# Altium PCB SS_MB_CONV2.0.PcbDoc (part 4 of 4)
Units mil, origin at the board's own origin, x right, y up, seen from the top; angles counter-clockwise.
Board outline 5818.45 x 4760.12 mil, 4 copper layers (Top Layer, Internal Plane 1, Internal Plane 2, Bottom Layer), stack 30.634 mil thick; 381 components, 398 nets, 1514 pads, 801 vias.
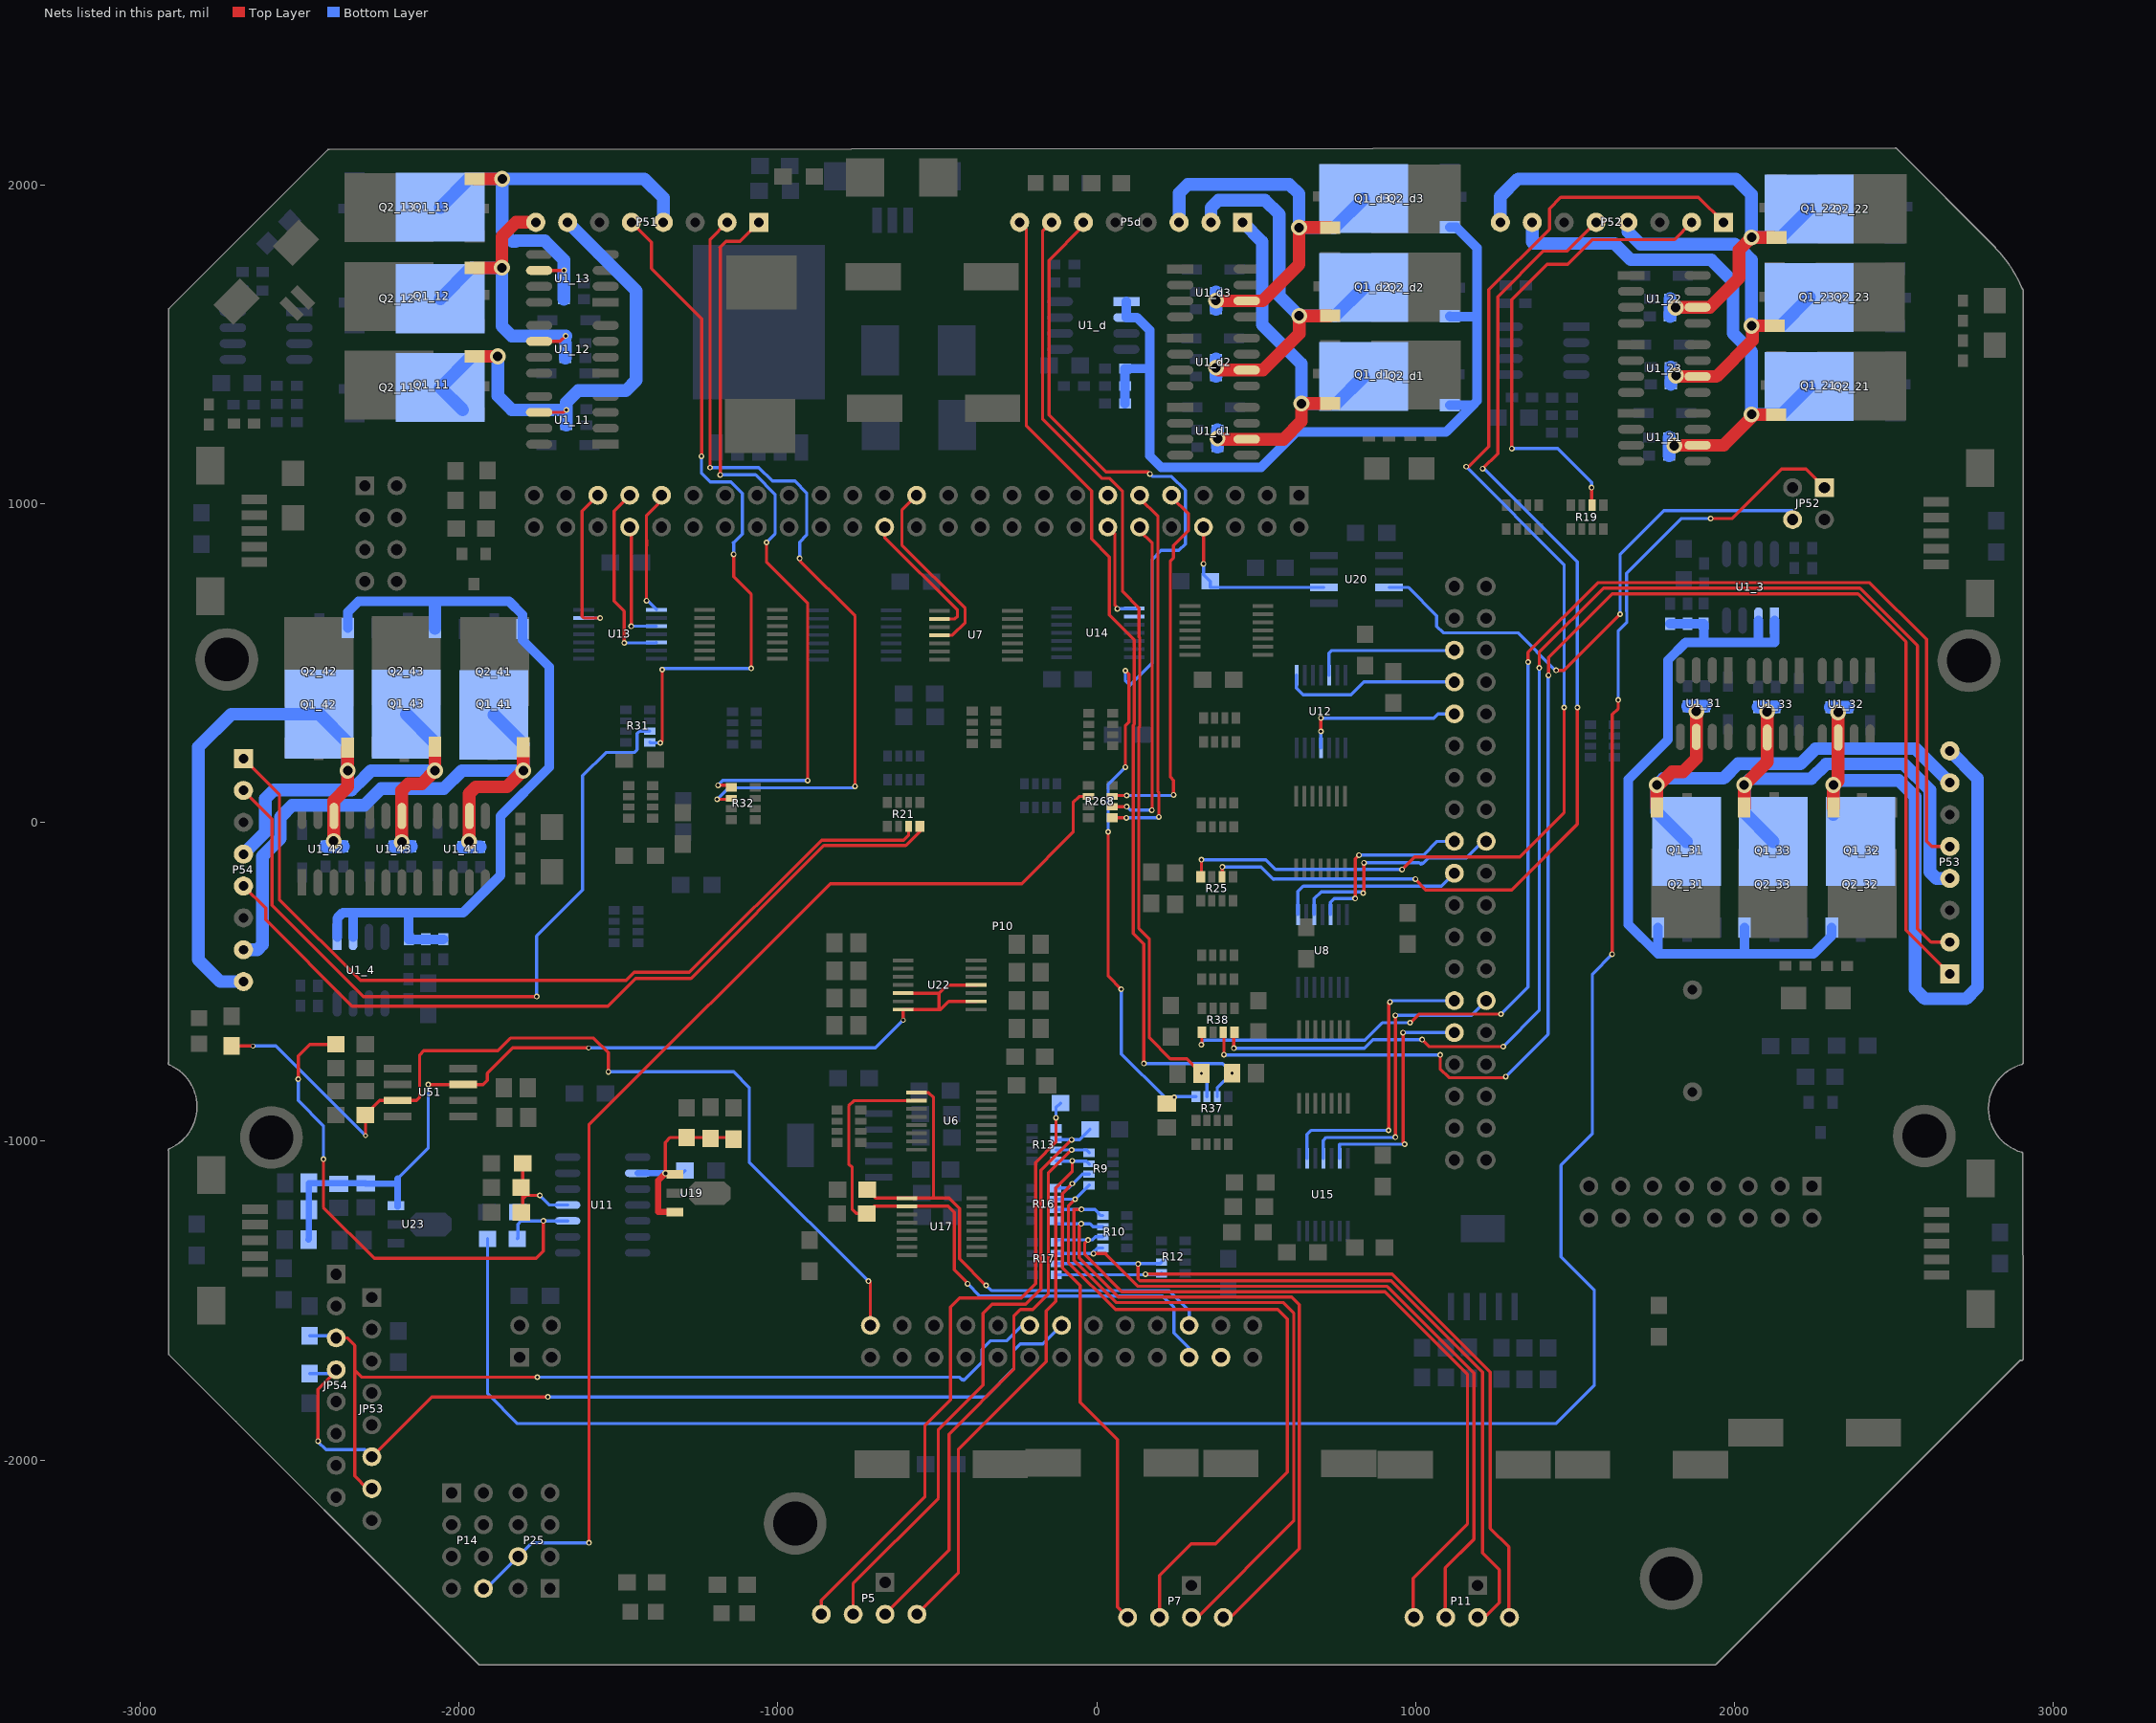
[diagram p6: the nets of this part, all layers, seen from the top]

## Via types
v1: diameter 18, hole 10, Top Layer to Bottom Layer, 606 vias
v2: diameter 25, hole 12, Top Layer to Bottom Layer, 77 vias
v3: diameter 15, hole 10, Top Layer to Bottom Layer, 44 vias
v4: diameter 20, hole 12, Top Layer to Bottom Layer, 43 vias
v5: diameter 50, hole 30, Top Layer to Bottom Layer, 28 vias
v6: diameter 30, hole 20, Top Layer to Bottom Layer, 1 vias
v7: diameter 40, hole 25, Top Layer to Bottom Layer, 1 vias
v8: diameter 30, hole 16, Top Layer to Bottom Layer, 1 vias

## Nets (pads, with @x,y where several pads share a name; then routed paths per layer and width w, separated by ;. In a path a pad name is that pad's centre, name@x,y a point inside that pad or via, vN(x,y) a via of type N, cw(c..) or ccw(c..) an arc to the next point about the centre after c; other vN are vias at no path point) (continued)
PGND_3: C3_31.1 C3_32.1 C3_33.1 Q2_31.3 Q2_32.3 Q2_33.3 U1_3.1 U1_3.2 | length 2437.2
  Bottom Layer w30: Q2_31.3@1760.08,-329.06 1760.08,-411.21 ; C3_32.1@1798.37,623.94 1798.87,624.44 C3_33.1@1904,624.44 1904,569.94 1899,564.94 ; Q2_33.3@2032.16,-329.06 2032.16,-411.21 1760.08,-411.21 ; 2033,-412.06 2249,-412.06 2306,-355.06 Q2_32.3@2306,-329.06 ; U1_3.2@2076,634.28 2076,567.94 2073,564.94 ; U1_3.1@2126,634.28 2126,565.94 2127,564.94 2073,564.94 ; 1760.08,-411.21 1760.08,-412.06 1667.54,-319.51 1667.54,135.48 1792,259.94 1792,509.94 1847,564.94 1899,564.94 ; 1899,564.94 2073,564.94
PGND_4: C3_41.1 C3_42.1 C3_43.1 Q2_41.3 Q2_42.3 Q2_43.3 U1_4.1 U1_4.2 | length 2525.8
  Bottom Layer w30: U1_4.1@-2383.04,-359 -2383.04,-300.04 -2365,-282 -2330,-282 ; Q2_42.3@-2349.04,609.84 -2349.04,660.96 -2316,694 -1843,694 -1801.04,652.04 Q2_41.3@-1801.04,607.69 -1801.04,573.04 -1717,489 -1717,174 -1870,21 -1870,-165 -1987,-282 -2165,-282 ; U1_4.2@-2333.04,-359 -2333.04,-285.04 -2330,-282 ; C3_43.1@-2049.5,-366 -2050,-366.5 C3_42.1@-2158,-366.5 -2158,-289 -2165,-282 ; -2330,-282 -2165,-282
  Bottom Layer w40: Q2_43.3@-2076.04,609.84 -2076.04,687.96
PGND_d: C3_d1.1 C3_d2.1 C3_d3.1 Q2_d1.3 Q2_d2.3 Q2_d3.3 U1_d.1 U1_d.2 | length 2603.4
  Bottom Layer w30: C3_d3.1@89,1314.7 C3_d1.1@89,1369.7 C3_d2.1@89,1424.7 161.26,1424.7 166,1419.96 ; U1_d.1@93,1635 U1_d.2@93,1585 126,1585 166,1545 166,1419.96 ; Q2_d1.3@1107,1310 1180,1310 ; Q2_d2.3@1107,1589 1109.04,1586.96 1193,1586.96 ; Q2_d3.3@1107,1868 1128,1868 1193,1803 1193,1586.96 ; 166,1419.96 166,1151 202,1115 515.5,1115 626.5,1226 1096,1226 1180,1310 ; 1180,1310 1193,1323 1193,1586.96
RES_F: P10.11 R268.1 | length 1181.5
  Top Layer w10: R268.1@48.8,15 v1(93,15) ; P10.11@134.81,1027.15 134.81,1018.19 192,961 192,97 195,94 v1(195,18)
  Bottom Layer w10: v1(93,15) 192,15 v1(195,18)
RXD0: U14.9
RXD0_F: P10.14 U14.8 | length 325.5
  Top Layer w10: P10.14@34.81,927.15 57,904.96 57,682 65,674 v1(65,671)
  Bottom Layer w10: v1(65,671) 120.73,671 U14.8@121.5,671.77
S1: P5.2 R13.8 R44.1 | length 2061.8
  Top Layer w10: P5.2@-864,-2484 -864,-2440 -539,-2115 -539,-1891 -459,-1811 -459,-1520 -431,-1492 -237,-1492 -192,-1447 -192,-1067 -128,-1003 v1(-128,-926)
  Bottom Layer w10: R13.8@-128,-960 v1(-128,-926) -128,-894.5 R44.1@-114,-880.5
S2: P5.3 R13.6 R43.1 | length 1954.9
  Top Layer w10: P5.3@-764,-2484 -764,-2387 -497,-2120 -497,-1905 -357,-1765 -357,-1540 -328,-1511 -223,-1511 -175,-1463 -175,-1091 v1(-79,-995)
  Bottom Layer w10: R13.6@-128,-995 v1(-79,-995) -54,-995 R43.1@-21,-962
S3: P5.4 R9.7 R13.4 | length 1829.5
  Top Layer w10: P5.4@-664,-2484 -463,-2283 -463,-1919 -260,-1716 -260,-1549 -239,-1528 -201,-1528 -152,-1479 -152,-1100 v1(-79,-1027)
  Bottom Layer w10: R13.4@-128,-1027 v1(-79,-1027) -32.8,-1027 R9.7@-23.8,-1036
S4: P5.5 R9.5 R13.2 | length 1732.6
  Top Layer w10: P5.5@-564,-2484 -434,-2354 -434,-1966.29 -159,-1691.29 -159,-1532 -128.78,-1501.78 -128.78,-1146.78 -77,-1095 v1(-77,-1061)
  Bottom Layer w10: R13.2@-128,-1062 -32.8,-1062 R9.5@-23.8,-1071
S5: P7.2 R9.3 R16.1 | length 1582.2
  Top Layer w10: v1(-77,-1133) -108,-1164 -108,-1397 -52,-1453 -52,-1819 65,-1936 65,-2462 P7.2@97,-2494
  Bottom Layer w10: R16.1@-129,-1147 -88.3,-1147 -44.3,-1103 R9.3@-23.8,-1103
S6: P7.3 R9.1 R16.3 | length 2238.2
  Top Layer w10: v1(-67.8,-1182) -89,-1203.2 -89,-1380.08 58.77,-1527.85 567.85,-1527.85 598,-1558 598,-2038 373,-2263 296,-2263 197,-2362 P7.3@197,-2494
  Bottom Layer w10: R16.3@-129,-1182 v1(-67.8,-1182) R9.1@-23.8,-1138
S7: P7.4 R10.7 R16.5 | length 2196.4
  Top Layer w10: v1(-48,-1214) -72,-1214 -72,-1373.04 60.96,-1506 585,-1506 618,-1539 618,-2191 315,-2494 P7.4@297,-2494
  Bottom Layer w10: R16.5@-129,-1214 v1(-48,-1214) -5.8,-1214 13.2,-1233 R10.7@19.2,-1233
S8: P7.5 R10.5 R16.7 | length 2115.7
  Top Layer w10: v1(-49,-1259) -55,-1265 -55,-1366 68,-1489 611.55,-1489 635,-1512.45 635,-2279 420,-2494 P7.5@397,-2494
  Bottom Layer w10: R16.7@-129,-1249 -129,-1258.78 -128.78,-1259 v1(-49,-1259) -21.22,-1259 -21,-1258.78 -11.78,-1268 R10.5@19.2,-1268
S9: P11.2 R10.3 R17.1 | length 2397.5
  Top Layer w10: v1(-27,-1310) -38,-1321 -38,-1354.28 -27,-1365.28 -27,-1366.04 78.96,-1472 903.96,-1472 1163,-1731.04 1163,-2201 993,-2371 P11.2@993,-2494
  Bottom Layer w10: R17.1@-127,-1317 -127,-1309.22 -13,-1309.22 -3.78,-1300 R10.3@19.2,-1300
S10: P11.3 R10.1 R17.3 | length 2311.7
  Top Layer w10: v1(-10,-1352.59) 28.59,-1352.59 29,-1353 29,-1355.04 128.96,-1455 911,-1455 1183,-1727 1183,-2249 1093,-2339 P11.3@1093,-2494
  Bottom Layer w10: R17.3@-127,-1352 -126,-1353 -125.59,-1352.59 v1(-10,-1352.59) -10,-1349 -11,-1348 2,-1335 R10.1@19.2,-1335
S11: P11.4 R12.3 R17.5 | length 2415
  Top Layer w10: v1(130,-1385) 130,-1432 136,-1438 923.96,-1438 1210,-1724.04 1210,-2292 1263,-2345 1263,-2448 1217,-2494 P11.4@1195,-2494 P11.4@1193,-2494
  Bottom Layer w10: R17.5@-127,-1384 198,-1384 R12.3@203,-1379
S12: P11.5 R12.1 R17.7 | length 2334.7
  Top Layer w10: v1(153,-1417) 927,-1417 1234.53,-1724.53 1234.53,-2214.53 1293,-2273 P11.5@1293,-2494
  Bottom Layer w10: R17.7@-127,-1419 198,-1419 R12.1@203,-1414
SA_1: P51.1 R32.1 | length 2360.6
  Top Layer w10: v1(-1188,117) -1152,117 R32.1@-1146,111 ; v1(-1181,1091) -1181,1804 -1182,1805 -1162.69,1824.31 -1119,1824.31 P51.1@-1059.73,1883.58 ; v1(-1036,879) -1036,818.08 -907,689.08 v1(-907,132)
  Bottom Layer w10: v1(-1188,117) -1173,132 v1(-907,132) ; v1(-1181,1091) -1070.31,1091 -1009,1029.69 -1009,906 v1(-1036,879)
SA_1_F: P10.43 U13.12 | length 598.2
  Top Layer w10: v1(-1482,564) -1482,663.04 -1514,695.04 -1514,978 -1465.19,1026.81 P10.43@-1465.19,1027.15
  Bottom Layer w10: v1(-1482,564) -1382.41,564 U13.12@-1381,565.41
SA_2: P52.1 R25.2 | length 4008
  Top Layer w10: R25.2@326,-170.2 328.59,-167.61 v1(328.59,-116.41) ; v1(958,-147) 997,-108 1327,-108 1466,31 v1(1466,361) ; v1(1159,1117) 1167,1117 1230,1180 1230,1672 1420,1862 1420,1926.34 1455.66,1962 1887.85,1962 P52.1@1966.27,1883.58
  Bottom Layer w10: v1(328.59,-116.41) 329.18,-117 452.78,-117 453.37,-116.41 530.41,-116.41 561,-147 v1(958,-147) ; v1(1159,1117) 1466,810 v1(1466,361)
SA_2_F: P10.144 U12.8 | length 561.3
  Bottom Layer w10: U12.8@626.64,462.5 626.64,421.41 647.02,401.02 798.1,401.02 838.22,441.15 P10.144@1121.81,441.15
SA_3: P53.1 R38.5 | length 4749.1
  Top Layer w10: R38.5@397,-657.8 399,-659.8 v1(399,-728) ; v1(1077.28,-729) 1077.28,-773.05 1104.61,-800.38 1279.78,-800.38 v1(1283.16,-797) ; v1(1417,462.5) 1417,518 1617,718 2388,718 2539,567 2539,-337.63 P53.1@2676.38,-475.01
  Bottom Layer w10: v1(399,-728) 400,-729 v1(1077.28,-729) ; v1(1283.16,-797) 1416,-664.16 1416,461.5 v1(1417,462.5)
SA_3_F: P10.133 U8.10 | length 727.2
  Top Layer w10: v1(836,-221) 838.35,-218.65 v1(838.35,-126)
  Bottom Layer w10: U8.10@682.23,-288.5 682.23,-238.77 704,-217 832,-217 v1(836,-221) ; v1(838.35,-126) 1011.04,-126 1013.04,-128 1014.04,-127 1017.04,-130 1020.04,-127 1022.04,-129 1040.04,-111 1159.4,-111 1211.55,-58.85 P10.133@1221.81,-58.85
SA_4: P54.1 R21.5 | length 2784
  Top Layer w10: P54.1@-2676.84,200.99 -2564,88.15 -2564,-241.04 -2310.04,-495 -1476.04,-495 -1451.04,-470 -1278.04,-470 -863.04,-55 -606,-55 -590,-39 R21.5@-590,-11.8
SA_4_F: P10.28 U7.2 | length 433.9
  Top Layer w10: P10.28@-665.19,927.15 -665.19,894.96 -437,666.77 -437,647 -444.82,639.18 U7.2@-493,639.18
SA_DB: P5d.6 R37.1 R91.2 | length 3489.4
  Top Layer w10: P5d.6@-41.73,1883.58 -41.73,1872.82 -150,1764.55 -150,1279 29,1100 161,1100 v1(167,1094) ; v1(36,-28.89) 36,-482 v1(77,-523) ; v1@88,172 v1(90,174) 90,304.72 101,315.72 101,466 v1(90,477)
  Bottom Layer w10: v1(36,-28.89) 36,120 v1(90,174) ; v1(77,-523) 77,-726 213,-862 v1(243,-862) 245,-860 R37.1@311,-860 ; v1(90,477) 90,445 104,431 174,501 174,826 202,854 257.77,854 277.8,874.03 277.8,1042.89 234.69,1086 174,1086 174,1087 v1(167,1094)
SA_DB_F: P10.123 U15.4 | length 972.2
  Top Layer w10: v1(937,-987) v1(937,-605)
  Bottom Layer w10: U15.4@710.82,-1053.5 710.82,-997.18 720,-988 v1(937,-987) ; v1(937,-605) 1175.66,-605 P10.123@1221.81,-558.85
SB_1: P51.2 R32.3 | length 2625.9
  Top Layer w10: v1(-1213,1114) -1213,1830.31 P51.2@-1159.73,1883.58 ; v1(-1191,73) -1149,73 R32.3@-1146,76 ; v1(-932,829) -932,822.04 -758,648.04 v1(-758,114)
  Bottom Layer w10: v1(-1213,1114) -1060,1114 -1017.57,1071.57 -946.43,1071.57 -910,1035.15 -910,902 -932,880 v1(-932,829) ; v1(-1191,73) -1155,109 -763,109 v1(-758,114)
SB_1_F: P10.41 U13.8 | length 394.5
  Top Layer w10: v1(-1412,696.41) -1412.85,697.26 -1412.85,867.45 -1411.85,868.45 -1411.85,885.85 -1412.85,886.85 -1412.85,962.15 -1365.19,1009.81 P10.41@-1365.19,1027.15
  Bottom Layer w10: v1(-1412,696.41) -1409.64,696.41 U13.8@-1381,667.77
SB_2: P52.2 R19.6 | length 1498.7
  Top Layer w10: v1(1302,1174) 1302,1641 1413,1752 1477.08,1752 1554.08,1829 1811.69,1829 P52.2@1866.27,1883.58 ; v1(1552.08,1051) 1552.08,997.72 R19.6@1554,995.8
  Bottom Layer w10: v1(1302,1174) 1446,1174 1552.08,1067.92 v1(1552.08,1051)
SB_2_F: P10.146 U12.12 | length 466.1
  Bottom Layer w10: U12.12@729,462.5 729,532 737,540 1120.66,540 P10.146@1121.81,541.15
SB_3: P53.2 R38.7 | length 4552.4
  Top Layer w10: v1(430,-708) 430,-659.8 R38.7@432,-657.8 ; v1(1021,-681) 1043,-703 v1(1275,-703) ; v1(1388,485.2) 1388,534 1590,736 2394.04,736 2575,555.04 2575,-332.68 2617.32,-375.01 P53.2@2676.38,-375.01
  Bottom Layer w10: v1(430,-708) 839.89,-708 866.89,-681 v1(1021,-681) ; v1(1275,-703) 1388,-590 v1(1388,485.2)
SB_3_F: P10.134 U8.12 | length 578.7
  Top Layer w10: v1(811,-238) 811,-114 v1(823,-102)
  Bottom Layer w10: U8.12@733.41,-288.5 733.41,-250 745.41,-238 v1(811,-238) ; v1(823,-102) 1025,-102 1068.15,-58.85 P10.134@1121.81,-58.85
SB_4: P54.2 R31.5 | length 2398.2
  Top Layer w10: P54.2@-2676.84,100.99 -2587,11.15 -2587,-260 -2301,-546 v1(-1757,-546)
  Bottom Layer w10: v1(-1757,-546) -1757,-356 -1613,-212 -1613,147 -1540,220 -1451,220 -1442,229 -1442,280 -1435,287 R31.5@-1402,287
SB_4_F: P10.45 U13.6 | length 510.4
  Top Layer w10: P10.45@-1565.19,1027.15 -1614.24,978.09 -1614.24,646.92 -1609.32,642 v1(-1558,642)
  Bottom Layer w10: U13.6@-1609.5,642.18 -1558.18,642.18 v1(-1558,642)
SB_DB: P5d.7 R37.3 R90.2 | length 3015.5
  Top Layer w10: P5d.7@-141.73,1883.58 -170,1855.31 -170,1267 17,1080 40.69,1080 81,1039.69 81,725 133,673 133,582.04 135,580.04 135,301.63 132,298.63 132,-332.45 165,-365.45 165,-675.12 230.88,-741 282.31,-741 v1(328.4,-787.09)
  Bottom Layer w10: v1(328.4,-787.09) 346,-804.69 R37.3@346,-860
SB_DB_F: P10.124 U15.2 | length 948
  Top Layer w10: v1(915.15,-965.85) 916.15,-964.85 916.15,-765.15 916,-765 916,-567 v1(920,-563)
  Bottom Layer w10: U15.2@659.64,-1053.5 659.64,-978.36 672.15,-965.85 v1(915.15,-965.85) ; v1(920,-563) 920,-559.7 919.15,-558.85 P10.124@1121.81,-558.85
SC_1: P51.5 R31.7 | length 2169.4
  Top Layer w10: P51.5@-1459.73,1883.58 -1397.15,1821 -1397.15,1739.15 -1239,1581 v1@-1239,1150 ; v1(-1369,250) -1363,256 v1(-1363,480) ; v1(-1139,842) -1139,772 -1084,717 v1(-1084,484)
  Bottom Layer w10: R31.7@-1402,252 -1400,250 v1(-1369,250) ; v1(-1363,480) -1363,482 -1365,484 v1(-1084,484) ; v1(-1240,1150) -1240,1096.15 -1212.53,1068.68 -1147.99,1068.68 -1112,1032.69 -1112,905 -1139,878 -1139,877 ; -1140,878 -1139,877 ; v1(-1139,842) -1139,877
SC_1_F: P10.44 U13.10 | length 401.4
  Top Layer w10: P10.44@-1465.19,927.15 -1460,921.96 v1(-1460,616)
  Bottom Layer w10: v1(-1460,616) -1463.82,616 -1464.41,616.59 U13.10@-1381,616.59
SC_2: P52.5 R25.6 | length 3472
  Top Layer w10: R25.6@393,-170.2 389.81,-167.01 394,-162.82 v1(394,-139) ; v1(1000,-177) 1000,-179 1032,-211 1302,-211 1508,-5 v1(1508,361) ; v1(1210.57,1110.57) 1258,1158 1258,1650 1401.31,1793.31 1476,1793.31 P52.5@1566.27,1883.58
  Bottom Layer w10: v1(394,-139) 515,-139 555,-179 557,-177 v1(1000,-177) ; v1(1210.57,1110.57) 1215.57,1110.57 1508,818.15 v1(1508,361)
SC_2_F: P10.142 U12.4 | length 515.5
  Top Layer w10: v1(703,286) v1(703,328)
  Bottom Layer w10: v1(703,328) 704,327 1057.04,327 1071.19,341.15 P10.142@1121.81,341.15 ; U12.4@703.41,234 v1@703.41,282.41
SC_3: P53.5 R38.1 | length 4320.7
  Top Layer w10: v1(328,-697) 330,-695 R38.1@330,-657.8 ; v1(983,-628) 1010,-601 v1(1268,-601) ; v1(1353,504) 1353,533.92 1572.08,753 2425,753 2603,575 2603,-58 2620.01,-75.01 P53.5@2676.38,-75.01
  Bottom Layer w10: v1(328,-697) 328,-692 337,-683 840.85,-683 895.85,-628 v1(983,-628) ; v1(1268,-601) 1353,-516 v1(1353,504)
SC_3_F: P10.132 U8.8 | length 587
  Bottom Layer w10: U8.8@631.05,-288.5 631.05,-215.95 648,-199 1081.66,-199 P10.132@1121.81,-158.85
SC_4: P54.5 R21.7 | length 2542.4
  Top Layer w10: P54.5@-2676.84,-199.01 -2607,-268.85 -2607,-305 -2336,-576 -1533,-576 -1446,-489 -1273,-489 -856,-72 -598.96,-72 -555,-28.04 R21.7@-555,-11.8
SC_4_F: P10.25 U7.4 | length 596.7
  Top Layer w10: P10.25@-565.19,1027.15 -611,981.34 -611,870 -413,672 -413,628 -453,588 U7.4@-493,588
SC_DB: P5d.8 R37.5 R89.2 | length 3185.8
  Top Layer w10: P5d.8@-241.73,1883.58 -221,1862.85 -221,1246 -16,1041 -16,890 40,834 40,651 118,573 118,308.67 115,305.67 115,-348 148,-381 v1(148,-756)
  Bottom Layer w10: v1(148,-756) 394.6,-756 v1(424.6,-786) 378,-832.6 R37.5@378,-860
SC_DB_F: P10.122 U15.6 | length 761.4
  Top Layer w10: v1(961,-659) 961,-1004 v1(966,-1009)
  Bottom Layer w10: U15.6@762,-1053.5 762,-1009 v1(966,-1009) ; v1(961,-659) 1121.66,-659 P10.122@1121.81,-658.85
SCK11: P14.8 P25.4 R268.6 | length 3750.2
  Top Layer w10: v1(-1593,-2260.22) -1593,-948.4 -836.1,-191.5 -235.42,-191.5 -74,-30.08 -74,63 -55,82 R268.6@-26,82
  Bottom Layer w10: P14.8@-1923.83,-2403.22 -1915,-2403.22 P25.4@-1815,-2303.22 -1772,-2260.22 v1(-1593,-2260.22)
SCL: P10.94 R35.2 U6.1 U17.1 | length 1680.5
  Top Layer w10: R35.2@-720,-1152 -693.77,-1178.23 U17.1@-595,-1178.23 -512,-1178.23 ; U6.1@-565,-847.23 -527.77,-847.23 -512,-863 -512,-1178.23 ; v1(-347,-1452) -430,-1369 -430,-1211 -462.77,-1178.23 -512,-1178.23
  Bottom Layer w10: v1(-347,-1452) -330.68,-1468.32 226.32,-1468.32 289.81,-1531.81 P10.94@289.81,-1577.85
SCL_24: JP53.7 JP54.3 P10.84 R107.2 | length 2872.3
  Top Layer w10: JP54.3@-2386,-1617 -2352,-1617 -2328,-1641 -2328,-1719 ; JP53.7@-2262,-2090 JP53.7@-2274,-2090 -2288,-2090 -2328,-2050 -2328,-1719 ; v1(-1755,-1740) -2307,-1740 -2328,-1719
  Bottom Layer w10: R107.2@-2469,-1610 -2393,-1610 JP54.3@-2386,-1617 ; v1(-1755,-1740) -431.27,-1740 -422.27,-1749 -420.27,-1747 -417.27,-1750 -360,-1692.73 -360,-1653 -333.04,-1626.04 -282.04,-1626.04 -233.85,-1577.85 P10.84@-210.19,-1577.85
SCLK_F: P10.9 R268.5 | length 1184.2
  Top Layer w10: R268.5@48.8,82 51.8,85 v1(94,85) ; P10.9@234.81,1027.15 234.81,1021.19 288,968 288,917 241,870 241,831.04 231,821.04 231,143 241,133 v1(241,87)
  Bottom Layer w10: v1(94,85) 239,85 v1(241,87)
SCS_F: P10.12 R268.3 | length 1033.5
  Top Layer w10: R268.3@48.8,50 v1(94,50) ; P10.12@134.81,927.15 134.81,916.15 174,876.96 174,40 v1(173,39)
  Bottom Layer w10: v1(94,50) 105,39 v1(173,39)
SDA: P10.93 R36.2 U6.2 U17.2 | length 1987.5
  Top Layer w10: U6.2@-565,-872.82 -761.82,-872.82 -778,-889 -778,-1071 -767,-1082 -767,-1214.01 -754.51,-1226.5 R36.2@-721.01,-1226.5 -698.32,-1203.82 U17.2@-595,-1203.82 -466.18,-1203.82 -447,-1223 -447,-1402.77 -405,-1444.77 v1(-405,-1447)
  Bottom Layer w10: v1(-405,-1447) -366.68,-1485.32 206.32,-1485.32 242,-1521 242,-1601.73 289.81,-1649.54 P10.93@289.81,-1677.85
SDA_24: JP53.6 JP54.4 P10.86 R106.2 | length 2894.4
  Top Layer w10: v1(-2443,-1941) -2443,-1778 -2386,-1721 JP54.4@-2386,-1717 ; JP53.6@-2274,-1990 -2086,-1802 v1(-1722,-1802)
  Bottom Layer w10: R106.2@-2469,-1729 -2398,-1729 JP54.4@-2386,-1717 ; v1(-2443,-1941) -2443,-1943 -2418,-1968 -2296,-1968 JP53.6@-2274,-1990 ; v1(-1722,-1802) -348,-1802 -260,-1714 -260,-1656.32 -240,-1636.32 -168.66,-1636.32 P10.86@-110.19,-1577.85
SHOOT: JP52.4 U20.7 | length 1709.4
  Top Layer w10: v1(1441,478) 1466,478 v1(1642,654)
  Bottom Layer w10: U20.7@917.25,738 977,738 1066,649 1066,616 1086.56,595.44 1321.56,595.44 1439,478 v1(1441,478) ; v1(1642,654) 1642,842 1779,979 JP52.4@2182,979
SHOOT_F: P10.8 R190.2 U20.2 | length 553.9
  Top Layer w10: v1(334.81,812) P10.8@334.81,927.15
  Bottom Layer w10: v1(334.81,812) 334.81,778.19 R190.2@356,757 356,739 357,738 U20.2@712.52,738
SHOOT_MANUAL: P10.95
SHOOT_OFF: P10.74 R112.1 R272.2 U51.7 | length 2986.7
  Top Layer w10: R272.2@-2714,-701 v3(-2647,-701) ; v3(-2294,-982) R112.1@-2294,-917 -2249,-872 U51.7@-2192.72,-872 -2134,-872 -2124,-862 -2124,-729 -2111,-716 -1879,-716 -1839,-676 -1578,-676 -1532,-722 v1(-1532,-782) ; v1(-716,-1439.04) -710.19,-1444.85 P10.74@-710.19,-1577.85
  Bottom Layer w10: v3(-2647,-701) -2575,-701 v3(-2294,-982) ; v1(-1532,-782) -1139,-782 -1090,-831 -1090,-1065.04 v1(-716,-1439.04)
TXD0: P10.13
VOLTAGE_BATTERY: C29.2 R14.2 R15.1 U11.4 | length 313.6
  Top Layer w10: R14.2@-1805,-1223 -1801,-1219 -1801,-1181 ; C29.2@-1801,-1069 -1801,-1181 ; v1(-1747,-1170) -1790,-1170 -1801,-1181
  Bottom Layer w10: v1(-1747,-1170) -1717,-1200 U11.4@-1660,-1200
VOLTAGE_CAP: JP52.1 R45.1 | length 7504.8
  Top Layer w10: v1(1617,-413) 1617,339 1636,358 v1(1636,385) ; v1(1926,954) 1993,954 2148,1109 2225,1109 JP52.1@2283,1051
  Bottom Layer w10: R45.1@-1911,-1306 -1911,-1792 -1817,-1886 1440,-1886 1561,-1765 1561,-1468 1456,-1363 1456,-1075 1555,-976 1555,-475 v1(1617,-413) ; v1(1636,385) 1636,602 1663,629 1663,662.7 1662,663.7 1662,783 1833,954 v1(1926,954)
VOLTAGE_CAP1: C49.2 R45.2 R182.2 U11.3 | length 1708.1
  Top Layer w10: v1(-2505,-805) -2505,-732.3 -2468.7,-696 R182.2@-2387,-696 ; v1(-2426,-1056) -2426,-1207.5 -2266.5,-1367 -1758,-1367 -1736,-1345 v1(-1736,-1250)
  Bottom Layer w10: v1(-2505,-805) -2505,-872 -2426,-951 v1(-2426,-1056) ; R45.2@-1818,-1306 -1816,-1304 -1816,-1260 -1806,-1250 v1(-1736,-1250) U11.3@-1660,-1250
VREF: C14.2 C16.2 C17.2 R125.1 U11.9 U19.1 U19.3 | length 653.7
  Top Layer w10: v4(-1353,-1100) -1353,-1003.23 -1337.77,-988 R125.1@-1287,-988 -1145,-988 C16.2@-1140,-993
  Top Layer w20: v4(-1353,-1100) -1375.95,-1122.95 -1375.95,-1222.05 U19.3@-1323.25,-1222.05
  Bottom Layer w10: v4(-1353,-1100) -1300,-1100 C14.2@-1292,-1092
  Bottom Layer w20: U11.9@-1440,-1100 v4(-1353,-1100)
VREF2: C75.2 C76.2 C77.2 R92.1 R93.2 U22.5 U22.7 U22.9 U22.11 U23.3 U51.3 | length 3031.9
  Top Layer w10: v1(-2097,-822) U51.3@-1988,-822 -1925,-822 -1912,-809 -1912,-787 -1832,-707 v3(-1594,-707) ; v3(-607,-620) U22.7@-607,-586.68 -489.86,-586.68 ; U22.5@-607,-535.5 -494.5,-535.5 ; U22.9@-378.5,-561.09 -464.27,-561.09 -489.86,-586.68 ; U22.11@-378.5,-509.91 -468.91,-509.91 -494.5,-535.5 ; -494.5,-535.5 -494.5,-582.04 -489.86,-586.68
  Bottom Layer w10: -2193.25,-1117.25 -2097,-1021 v1(-2097,-822) ; v3(-1594,-707) -694,-707 v3(-607,-620)
  Bottom Layer w20: R92.1@-2473,-1309 -2471.6,-1307.6 C77.2@-2471.6,-1215 C76.2@-2471.6,-1131 -2294.6,-1131 C75.2@-2293,-1132.6 -2194,-1132.6 -2193.25,-1133.35 ; U23.3@-2193.25,-1204.95 -2193.25,-1133.35 ; -2193.25,-1117.25 -2193.25,-1133.35
Wout_11: C1_11.2 C2_11.2 P51.7 Q1_11.3 Q2_11.2 U1_11.6 | length 1745.2
  Top Layer w10: U1_11.6@-1746.64,1285 U1_11.6@-1749,1287.36 -1673.64,1287.36 v1@-1664,1297
  Top Layer w40: Q1_11.3@-1951,1462.96 v5(-1878.96,1462.96)
  Bottom Layer w40: Q2_11.2@-1989.12,1295 Q2_11.2@-2059.16,1365.04 -1961.24,1462.96 v5(-1878.96,1462.96) -1878.96,1338.96 -1835,1295 v1(-1664,1295) ; C2_11.2@-1664,1247 v1(-1664,1295) ; P51.7@-1659.73,1883.58 -1445,1668.85 -1445,1388 -1477,1356 -1626.5,1356 -1664,1318.5 C1_11.2@-1664,1297 v1(-1664,1295)
Wout_12: C1_12.2 C2_12.2 P51.8 Q1_12.3 Q2_12.2 U1_12.6 | length 1076.1
  Top Layer w10: U1_12.6@-1746,1513 U1_12.6@-1749,1510 -1683,1510 v1(-1666,1527)
  Top Layer w40: Q1_12.3@-1951,1740.92 v5@-1868.08,1740.92 ; v5(-1866.16,1740.92) -1866.16,1838.84 -1821.42,1883.58 P51.8@-1759.73,1883.58
  Bottom Layer w40: Q2_12.2@-2059.16,1643.96 -1962.2,1740.92 v5(-1866.16,1740.92) -1866.16,1558.16 -1835,1527 v1(-1666,1527) ; C1_12.2@-1667,1458 C2_12.2@-1667,1505
Wout_13: C1_13.2 C2_13.2 P51.4 Q1_13.3 Q2_13.2 U1_13.6 | length 1522.3
  Top Layer w10: U1_13.6@-1749,1732.64 v1(-1671.5,1732.64)
  Top Layer w40: Q1_13.3@-1951,2019.92 v5(-1865.08,2019.92)
  Bottom Layer w40: Q2_13.2@-2059.16,1931 -1970.24,2019.92 v5(-1865.08,2019.92) ; C2_13.2@-1671.5,1642 C1_13.2@-1671.5,1692 v1(-1671.5,1732.64) -1671.5,1765.5 -1732,1826 -1820.5,1826 -1823.5,1823 -1832,1823 -1865.08,1856.08 v5(-1865.08,2019.92) ; P51.4@-1359.73,1883.58 -1359.73,1960.73 -1418.92,2019.92 v5(-1865.08,2019.92)
Wout_21: C1_21.2 C2_21.2 P52.7 Q1_21.3 Q2_21.2 U1_21.6 | length 1817
  Top Layer w40: v5(1812,1183) 1813,1184 U1_21.6@1885,1184 1967,1184 2063.08,1280.08 Q1_21.3@2130.76,1280.08
  Bottom Layer w40: P52.7@1366.27,1883.58 1366.27,1821.73 1371,1817 1624.58,1817 1675.58,1766 1928,1766 1996,1698 1996,1536 2054,1478 v5(2054,1281) 2148.27,1281 Q2_21.2@2235.31,1368.04 ; C2_21.2@1795.5,1152 1796.16,1152.66 C1_21.2@1796.16,1208.5
Wout_22: C1_22.2 C2_22.2 P52.8 Q1_22.3 Q2_22.2 U1_22.6 | length 1768.8
  Top Layer w40: v5(1816,1616) 1817,1617 U1_22.6@1885,1617 1923,1617 2015,1709 2015,1797 v5(2054,1836) Q1_22.3@2122,1836
  Bottom Layer w40: P52.8@1266.27,1883.58 1266.27,1964.27 1322,2020 2005,2020 2054,1971 v5(2054,1836) 2145.35,1836 Q2_22.2@2234.31,1924.96 ; C2_22.2@1798,1588 1798.5,1588.5 C1_22.2@1798.5,1644
Wout_23: C1_23.2 C2_23.2 P52.4 Q1_23.3 Q2_23.2 U1_23.6 | length 1337.5
  Top Layer w40: v5(1817,1403) 1820.3,1399.7 U1_23.6@1885,1399.7 1943.7,1399.7 2057.08,1513.08 2057.08,1559.08 Q1_23.3@2126,1559.08
  Bottom Layer w40: P52.4@1666.27,1883.58 1666.27,1853.73 1705.27,1814.73 2002,1814.73 2002,1814.46 2032.46,1784 2036,1784 2054,1766 v5(2054,1559.08) 2146.43,1559.08 Q2_23.2@2235.31,1647.96 ; C1_23.2@1801,1374.7 C2_23.2@1801,1429.7
Wout_31: C1_31.2 C2_31.2 P53.7 Q1_31.3 Q2_31.2 U1_31.6 | length 1653.7
  Top Layer w40: Q1_31.3@1757.08,47.94 1757.08,110.86 1805.16,158.94 1839,158.94 1881,200.94 U1_31.6@1881,268.94 v5(1881,348.94)
  Bottom Layer w40: Q2_31.2@1850.04,-59.37 1757.08,33.59 v5(1757.08,117.86) 1778.16,138.94 1966.04,138.94 2012.04,184.94 2208,184.94 2255,231.94 2569.43,231.94 P53.7@2676.38,124.99 ; C1_31.2@1853.7,364.94 C2_31.2@1908.7,364.94
Wout_32: C1_32.2 C2_32.2 P53.8 Q1_32.3 Q2_32.2 U1_32.6 | length 2339.9
  Top Layer w40: Q1_32.3@2311,47.1 2311,114.94 2326,129.95 U1_32.6@2326,266.95 v5(2326,345.95)
  Bottom Layer w40: C1_32.2@2301.7,361.94 C2_32.2@2356.7,361.94 ; Q2_32.2@2311,25.59 v5(2311,117.86) 2325.08,131.94 2516,131.94 2567,80.94 2567,-522 2598,-553 2727,-553 2763,-517 2763,138.37 P53.8@2676.38,224.99
Wout_33: C1_33.2 C2_33.2 P53.4 Q1_33.3 Q2_33.2 U1_33.6 | length 1573.1
  Top Layer w40: Q1_33.3@2031.08,46.94 v5(2031.08,117.86) 2103.36,190.15 U1_33.6@2103.36,266.95 v5(2103.36,348.28)
  Bottom Layer w40: C1_33.2@2074.7,362.94 C2_33.2@2129.7,362.94 ; Q2_33.2@2122.12,-59.37 2031.08,31.67 v5(2031.08,117.86) 2051,137.78 2241.28,137.78 2287.44,183.94 2532.06,183.94 2614,102 2614,-155 2634.01,-175.01 P53.4@2676.38,-175.01
Wout_41: C1_41.2 C2_41.2 P54.7 Q1_41.3 Q2_41.2 U1_41.6 | length 2002.8
  Top Layer w40: v5(-1969,-59) -1969,91 -1948,112 -1850.12,112 v5(-1799.08,163.04) Q1_41.3@-1799.08,236
  Bottom Layer w40: P54.7@-2676.84,-399.01 -2633.01,-399.01 -2617,-383 -2617,-105.64 -2561,-49.64 -2561,17 -2524,54 -2298,54 -2245,107 -2048,107 -1991.96,163.04 v5(-1799.08,163.04) -1799.08,246.08 Q2_41.2@-1891,338 ; C2_41.2@-1989.7,-76 C1_41.2@-1934.7,-76
Wout_42: C1_42.2 C2_42.2 P54.8 Q1_42.3 Q2_42.2 U1_42.6 | length 1838.6
  Top Layer w40: v5(-2393.7,-58) -2393.7,68.3 -2350,112 v5(-2350,163.04) Q1_42.3@-2350,235
  Bottom Layer w40: P54.8@-2676.84,-499.01 -2748.99,-499.01 -2818,-430 -2818,237 -2714.84,340.16 Q2_42.2@-2439,340.16 -2350,251.16 v5(-2350,163.04) ; C2_42.2@-2418.7,-75 C1_42.2@-2363.7,-75
Wout_43: C1_43.2 C2_43.2 P54.4 Q1_43.3 Q2_43.2 U1_43.6 | length 1407.4
  Top Layer w40: v5(-2180,-61) U1_43.6@-2180,20.66 -2180,101 -2159,122 -2117.08,122 v5(-2076.04,163.04) Q1_43.3@-2076.04,238.16
  Bottom Layer w40: P54.4@-2676.84,-99.01 -2608,-30.17 -2608,75 -2581,102 -2337.5,102 -2298,141.5 -2298,142 -2276.96,163.04 v5(-2076.04,163.04) -2076.04,250.2 Q2_43.2@-2166,340.16 ; C2_43.2@-2205.7,-75 C1_43.2@-2150.7,-75
Wout_d1: C1_d1.2 C2_d1.2 P5d.1 Q1_d1.3 Q2_d1.2 U1_d1.6 | length 1363.5
  Top Layer w40: v5(379,1205.5) 381.54,1202.96 U1_d1.6@470.66,1202.96 585.96,1202.96 642,1259 v5(642,1315) Q1_d1.3@732,1315
  Bottom Layer w40: C1_d1.2@379,1178 v5(379,1205.5) C2_d1.2@379,1233 ; P5d.1@458.27,1883.58 519,1822.85 519,1563 642,1440 v5(642,1315) 752.35,1315 Q2_d1.2@837.31,1399.96
Wout_d2: C1_d2.2 C2_d2.2 P5d.2 Q1_d2.3 Q2_d2.2 U1_d2.6 | length 1391
  Top Layer w40: v5(374,1427.2) 381.24,1419.96 U1_d2.6@470.66,1419.96 520.96,1419.96 635,1534 v5(635,1590) Q1_d2.3@732,1590
  Bottom Layer w40: P5d.2@358.27,1883.58 358.27,1929.27 382,1953 528,1953 572,1909 572,1653 v5(635,1590) 748.35,1590 Q2_d2.2@837.31,1678.96 ; C1_d2.2@374,1399.7 v5(374,1427.2) C2_d2.2@374,1454.7
Wout_d3: C1_d3.2 C2_d3.2 P5d.3 Q1_d3.3 Q2_d3.2 U1_d3.6 | length 1414.4
  Top Layer w40: v5(374,1638.2) 375.24,1636.96 U1_d3.6@470.66,1636.96 519.96,1636.96 634.89,1751.89 v5(634.89,1867.08) Q1_d3.3@732,1867.08
  Bottom Layer w40: P5d.3@258.27,1883.58 258.27,1976 285.27,2003 604,2003 634.89,1972.11 v5(634.89,1867.08) 746.43,1867.08 Q2_d3.2@837.31,1957.96 ; C1_d3.2@374,1610.7 v5(374,1638.2) C2_d3.2@374,1665.7
pads on no net: JP1. JP2. JP52.3 JP53.4 JP53.5 JP53.8 JP54.5 JP54.6 JP54.7 JP54.8 P1. P1.2 P2. P2.2 P3. P3.2 P4. P4.2 P10.20 P10.21 P10.46 P10.49 P10.50 P10.73 P10.75 P10.76 P10.77 P10.78 P10.79 P10.80 P10.82 P10.87 P10.91 P10.98 P10.113 P10.125 P25.1 R12.5 R12.6 R12.7 R12.8 R34.6 R38.3 R38.4 R39.3 R50.1 R50.2 U3.7 U3.9 U3.11 U6.7 U6.13 U6.14 U8.2 U11.1 U11.5 U11.6 U14.2 U15.12 U20.1 U20.8

## Polygon pours and split planes (outlines as drawn)
GND on Internal Plane 1 (split plane): 2800.94,1794.73 2800.95,1794.72 2802.8,1791.24 2802.87,1791.16 2802.95,1790.95 2803,1791 2805.3,1788.2 2805.47,1788.06 2814.34,1778.79 2825.23,1766.37 2835.57,1753.49 2845.34,1740.17 2854.51,1726.44 2863.08,1712.32 2871.03,1697.84 2878.33,1683.03 2884.98,1667.91 2885.19,1667.37 2885.4,1666.69 2885.42,1666.62 2885.9,1665.73 2885.9,-742.89 2877.84,-745.92 2868.12,-750.33 2858.71,-755.36 2849.65,-760.99 2840.97,-767.21 2832.72,-773.98 2824.93,-781.27 2817.64,-789.06 2810.87,-797.31 2804.65,-805.98 2799.02,-815.04 2793.99,-824.46 2789.58,-834.18 2785.83,-844.16 2782.73,-854.37 2780.31,-864.77 2778.57,-875.3 2777.52,-885.92 2777.17,-896.58 2777.52,-907.25 2778.57,-917.87 2780.31,-928.39 2782.73,-938.79 2785.83,-949 2789.58,-958.99 2793.99,-968.71 2799.02,-978.12 2804.65,-987.18 2810.87,-995.85 2817.64,-1004.1 2824.93,-1011.89 2832.72,-1019.19 2840.97,-1025.95 2849.65,-1032.17 2858.71,-1037.81 2868.12,-1042.84 2877.84,-1047.24 2885.06,-1049.96 2885.88,-1670.24 2883.26,-1672.39 2692.59,-1863.06 2692.43,-1863.26 2692.39,-1863.29 2691.53,-1862.42 2691.45,-1862.45 2690.96,-1863.65 2691.53,-1864.14 1932.75,-2622.92 -1928.75,-2622.92 -2686.28,-1865.39 -2685.42,-1864.53 -2685.45,-1864.45 -2685.53,-1864.42 -2686.39,-1865.28 -2891.92,-1659.75 -2891.92,-1037.18 -2883.73,-1032.81 -2874.67,-1027.17 -2866,-1020.95 -2857.75,-1014.19 -2849.96,-1006.89 -2842.67,-999.1 -2835.9,-990.85 -2829.68,-982.18 -2824.05,-973.12 -2819.02,-963.71 -2814.61,-953.99 -2810.85,-944 -2807.76,-933.79 -2805.33,-923.39 -2803.59,-912.87 -2802.55,-902.25 -2802.2,-891.73 -2802.19,-891.58 -2802.2,-891.44 -2802.55,-880.92 -2803.59,-870.3 -2805.33,-859.77 -2807.76,-849.37 -2810.85,-839.16 -2814.61,-829.18 -2819.02,-819.46 -2824.05,-810.04 -2829.68,-800.98 -2835.9,-792.31 -2842.67,-784.06 -2849.96,-776.27 -2857.75,-768.98 -2866,-762.21 -2874.67,-755.99 -2883.73,-750.36 -2891.92,-745.98 -2891.92,1603.24 -2402.35,2092.8 2498.67,2097
+5V on Internal Plane 2 (split plane): 1665.28,1061.71 1664.91,1057 1664.91,-1064.91 747.74,-1064.91 747.74,548.36 747.37,553.06 746.26,557.66 744.99,560.74 744.46,562.02 741.99,566.04 738.92,569.64 688.28,620.28 684.69,623.35 680.66,625.81 679.38,626.34 676.3,627.62 671.71,628.72 667,629.09 -1712.54,629.09 -1798.72,715.28 -1802.31,718.35 -1806.34,720.81 -1807.62,721.34 -1810.7,722.62 -1815.29,723.72 -1820,724.09 -1826.91,724.09 -1826.91,1063.91 684.77,1063.91 685.34,1063.56 689.7,1061.75 694.29,1060.65 699,1060.28 703.71,1060.65 708.3,1061.75 712.66,1063.56 713.23,1063.91 1658,1063.91 1662.71,1064.28 1666.09,1065.09
+16V1 on Internal Plane 2 (split plane): 668.91,1124.09 -1833.85,1124.09 -1835.72,1126.28 -1839.31,1129.35 -1843.34,1131.81 -1847.7,1133.62 -1852.29,1134.72 -1857,1135.09 -1861.71,1134.72 -1866.3,1133.62 -1870.66,1131.81 -1874.69,1129.35 -1878.28,1126.28 -1881.35,1122.69 -1883.81,1118.66 -1885.62,1114.3 -1886.72,1109.71 -1887.09,1105 -1887.09,724.09 -2355.91,724.09 -2355.91,842.91 -2066,842.91 -2061.29,843.28 -2056.7,844.38 -2052.34,846.19 -2048.31,848.65 -2044.72,851.72 -2041.65,855.31 -2039.19,859.34 -2037.38,863.7 -2036.28,868.29 -2035.91,873 -2035.91,1125 -2035.91,1204.54 -1952.54,1287.91 668.91,1287.91
3.3V_2401 on Internal Plane 2 (split plane): 1668.19,-1126.66 1670.65,-1130.69 1673.72,-1134.28 1677.31,-1137.35 1681.34,-1139.81 1685.7,-1141.62 1690.29,-1142.72 1695,-1143.09 2562.29,-1143.09 2567,-1142.72 2571.59,-1141.62 2575.95,-1139.81 2576.91,-1139.23 2576.91,-1787.91 957.09,-1787.91 957.09,-1125.09 1667.54,-1125.09
+16V2 on Internal Plane 2 (split plane): 2576.91,1754.54 2576.91,-1086.77 2575.95,-1086.19 2571.59,-1084.38 2567,-1083.28 2562.29,-1082.91 1725.09,-1082.91 1725.09,1057 1724.72,1061.71 1723.62,1066.3 1721.81,1070.66 1719.35,1074.69 1716.28,1078.28 1712.69,1081.35 1708.66,1083.81 1704.3,1085.62 1699.71,1086.72 1695,1087.09 1690.29,1086.72 1686.91,1085.91 1687.72,1089.29 1688.09,1094 1687.72,1098.71 1686.62,1103.3 1684.81,1107.66 1682.35,1111.69 1679.28,1115.28 1675.69,1118.35 1671.66,1120.81 1667.3,1122.62 1662.71,1123.72 1658,1124.09 729.09,1124.09 729.09,1318 728.72,1322.71 727.62,1327.3 725.81,1331.66 723.35,1335.69 720.28,1339.28 716.69,1342.35 712.66,1344.81 708.3,1346.62 703.71,1347.72 699,1348.09 -1965,1348.09 -1969.71,1347.72 -1974.3,1346.62 -1978.66,1344.81 -1982.69,1342.35 -1986.28,1339.28 -2087.28,1238.28 -2090.35,1234.69 -2092.81,1230.66 -2093.34,1229.38 -2094.62,1226.3 -2095.72,1221.71 -2096.09,1217 -2096.09,1125 -2096.09,903.09 -2386,903.09 -2390.71,902.72 -2395.3,901.62 -2399.66,899.81 -2403.69,897.35 -2407.28,894.28 -2410.35,890.69 -2412.81,886.66 -2414.62,882.3 -2415.72,877.71 -2416.09,873 -2415.97,871.5 -2416.09,870 -2416.09,704.57 -2416.62,703.3 -2417.72,698.71 -2418.09,694 -2417.72,689.29 -2416.62,684.7 -2414.81,680.34 -2412.35,676.31 -2409.28,672.72 -2405.69,669.65 -2401.66,667.19 -2397.3,665.38 -2392.71,664.28 -2388,663.91 -1832.46,663.91 -1765.97,597.41 -1765.72,594.29 -1764.62,589.7 -1762.81,585.34 -1760.35,581.31 -1757.28,577.72 -1753.69,574.65 -1749.66,572.19 -1745.3,570.38 -1740.71,569.28 -1737.59,569.03 -1675.09,506.54 -1675.09,-511.54 -1710.46,-546.91 -2589.96,-546.91 -2589.96,1469.49 -2248.5,1810.95 2520.5,1810.95
+5V on Internal Plane 2 (split plane): 151 vertices, not listed, extent -2891.92,-1918.58 2885.9,2097
+3.3V on Internal Plane 2 (split plane): -664.09,-2622.92 -1928.75,-2622.92 -2600.11,-1951.56 -2597.65,-1948.69 -2595.19,-1944.66 -2593.38,-1940.3 -2592.28,-1935.71 -2591.91,-1931 -2591.91,-1297 -2591.91,-1189.09 -664.09,-1189.09
3.3V on Internal Plane 2 (split plane): 687.55,535.89 687.55,-1095 687.92,-1099.71 689.02,-1104.3 690.83,-1108.66 693.3,-1112.69 696.36,-1116.28 699.96,-1119.35 703.98,-1121.81 708.34,-1123.62 712.94,-1124.72 717.64,-1125.09 896.91,-1125.09 896.91,-1818 897.28,-1822.71 898.38,-1827.3 900.19,-1831.66 902.65,-1835.69 905.72,-1839.28 909.31,-1842.35 913.34,-1844.81 917.7,-1846.62 922.29,-1847.72 927,-1848.09 2576.91,-1848.09 2576.91,-1960 2577.28,-1964.71 2578.38,-1969.3 2580.19,-1973.66 2580.88,-1974.79 1932.75,-2622.92 -603.91,-2622.92 -603.91,-1160 -604.28,-1155.29 -605.38,-1150.7 -607.19,-1146.34 -609.65,-1142.31 -612.72,-1138.72 -613.26,-1138.26 -613.72,-1137.72 -617.31,-1134.65 -621.34,-1132.19 -625.7,-1130.38 -630.29,-1129.28 -635,-1128.91 -2589.96,-1128.91 -2589.96,-607.09 -1698,-607.09 -1693.29,-606.72 -1688.7,-605.62 -1685.62,-604.34 -1684.34,-603.81 -1680.31,-601.35 -1676.72,-598.28 -1623.72,-545.28 -1620.65,-541.69 -1618.19,-537.66 -1617.66,-536.38 -1616.38,-533.3 -1615.28,-528.71 -1614.91,-524 -1614.91,519 -1615.28,523.71 -1616.38,528.3 -1618.19,532.66 -1620.65,536.69 -1623.72,540.28 -1652.35,568.91 654.54,568.91

## Keep-outs
Keep-Out Layer:
  lines w0: 2900.12,-1039.04 2900.98,-1683.02
  lines w10: -2907.44,-1027.82 ccw(c-2965.27,-891.58) -2907.44,-755.35 ; -2907,-1028 -2907,-1666 -2697,-1876 ; -2907,-756 -2907,1609.49 -2408.61,2107.88 -2407,2107.88 2504.91,2112.09 2814.5,1802.5 ; -2707,-1866 -2697,-1876 ; 1937,-2638 1939,-2638 ; 2793.26,1820.21 cw(c2535.25,1523.05) 2900.2,1670.3 ; 2900.43,-754.04 ccw(c2940.24,-896.58) 2900.12,-1039.04 2900.98,-1683.02 ; 2900.98,-754.04 2900.98,1670.3 ; -2697,-1876 -2515,-2058 -1935,-2638 359.11,-2638 1939,-2638 ; 1939,-2638 2519,-2058 2703,-1874 ; 2703,-1874 2703,-1873.98 ; 2703,-1873.98 2900.98,-1676 ; 2703,-1873.98 2900.98,-1676 ; 2703,-1873.98 2900.98,-1676

## Other copper
Internal Plane 2 (plane layer: these items are gaps in the copper):
  lines w10: -2907,-1654.3 -2907,-1653.69 ; -2632,-1944 -2632,-1921 ; -2388,694 -2386,696 ; -635,-1159 -634,-1160 ; 927,-1818 937,-1828 ; 1122,1093 1134,1081 ; 1658,1094 1695,1057 ; 2562.29,-1113 2597,-1113 2600,-1116 ; 2900,-1045 2900.98,-1044.02
  lines w60: -2622,-1931 -2622,-1297 -2622,-1159 -635,-1159 ; -2620.05,-1154.29 -2620.05,1481.95 -2260.96,1841.04 2532.96,1841.04 2607,1767 2607,-1960 ; -2610,-577 -1698,-577 -1645,-524 -1645,519 -1820,694 -2039,694 ; -2388,694 -2015,694 ; -2386,696 -2386,870 ; -2386,873 -2066,873 -2066,1125 -2066,1217 -1965,1318 699,1318 699,1090.37 ; -1857,702 -1857,1105 ; -1857,1094 1658,1094 ; -1736,599 667,599 717.64,548.36 717.64,-1095 1677,-1095 ; -634,-2630 -634,-1160 ; 927,-1095 927,-1818 2597,-1818 ; 1695,1057 1695,-1113 2562.29,-1113

## Silkscreen, mask and mechanical layers (free items; w line width, h text height)
Top Overlay:
  circle w10: c0.72,-0.21 r3385.83
  text "IR" at -208,2071 h30
  text "MOTOR_d" at 213,1972.5 h50
  text "MOTOR_1" at -2865,1468 h50
  text "MOTOR_2" at 2574.91,1273.5 h50
  text "MOTOR_4" at -1936,-361.5 h50
  text "MOTOR_3" at 2463,-693.5 h50
  text "V_CAP" at -2771,-802 h30
  text "Mother_Board" at 1404.07,-2525.36 h80 r359.92
  text "num" at -103,-2579 h40
  text "freq" at -1042,-2580 h40
  text "set" at 841,-2582 h40
  text "COMM" at -1291.93,-2592 h40
  text "HEART" at -1616.93,-2593 h40
  text "2018.05 By Icassy" at 1412.07,-2606.36 h80 r359.92
Mechanical 1:
  lines w10: -2907.44,-1027.82 ccw(c-2965.27,-891.58) -2907.44,-755.35 ; -2406.3,2110.18 -2907,1609.49 ; -2404,2107.88 2501.11,2112.09 2825.6,1787.6 ; 2825.06,1786.98 cw(c2655,1592) 2902,1669 ; 2900.12,-1034.04 cw(c2940.24,-891.58) 2900.43,-749.04 2900.43,1667.43 ; 2900.98,-1559.15 2900.98,-1034.04 ; 2900.98,-1511 2900.98,-1678.02 ; -2907,-1666 -2907,-1028 -2907,-1666 ; -2907,-1666 -1933,-2640 -1742,-2640 1939,-2640 2551,-2028 ; -2907,1609.49 -2907,-756 -2907,1609.49 ; 2551,-2028 2900.98,-1678.02 ; 2551,-2028 2900.98,-1678.02

## Text inside footprints (layer, text, board x,y; h text height)
C2: Top Overlay "+" at -762,1220 h30
C4: Top Overlay "+" at -738,-2093 h30
C51: Top Overlay "+" at -766,1633 h30
JP53: Top Overlay "1" at -2265,-1419 h30 r90; Top Overlay "8" at -2259,-2285 h30 r90
JP54: Top Overlay "1" at -2377,-1346 h30 r90; Top Overlay "8" at -2371,-2212 h30 r90
L1: Top Overlay "L" at -874,1850 h30 r270
P14: Top Overlay "8" at -1943.83,-2463.22 h30 r270; Top Overlay "7" at -2043.83,-2463.22 h30 r270; Top Overlay "1" at -2043.83,-2023.22 h30 r270; Top Overlay "2" at -1943.83,-2003.22 h30 r270
P25: Top Overlay "8" at -1795,-2043.22 h50 r90; Top Overlay "7" at -1695,-2043.22 h50 r90; Top Overlay "1" at -1695,-2483.22 h50 r90; Top Overlay "2" at -1795,-2503.22 h50 r90
U3: Top Overlay "2" at 2306,-1284 h30; Top Overlay "1" at 2315,-1150 h30; Top Overlay "15" at 1407.24,-1148.24 h30; Top Overlay "16" at 1441,-1250 h30